# EAGLE board board (EAGLE 9.2.0)
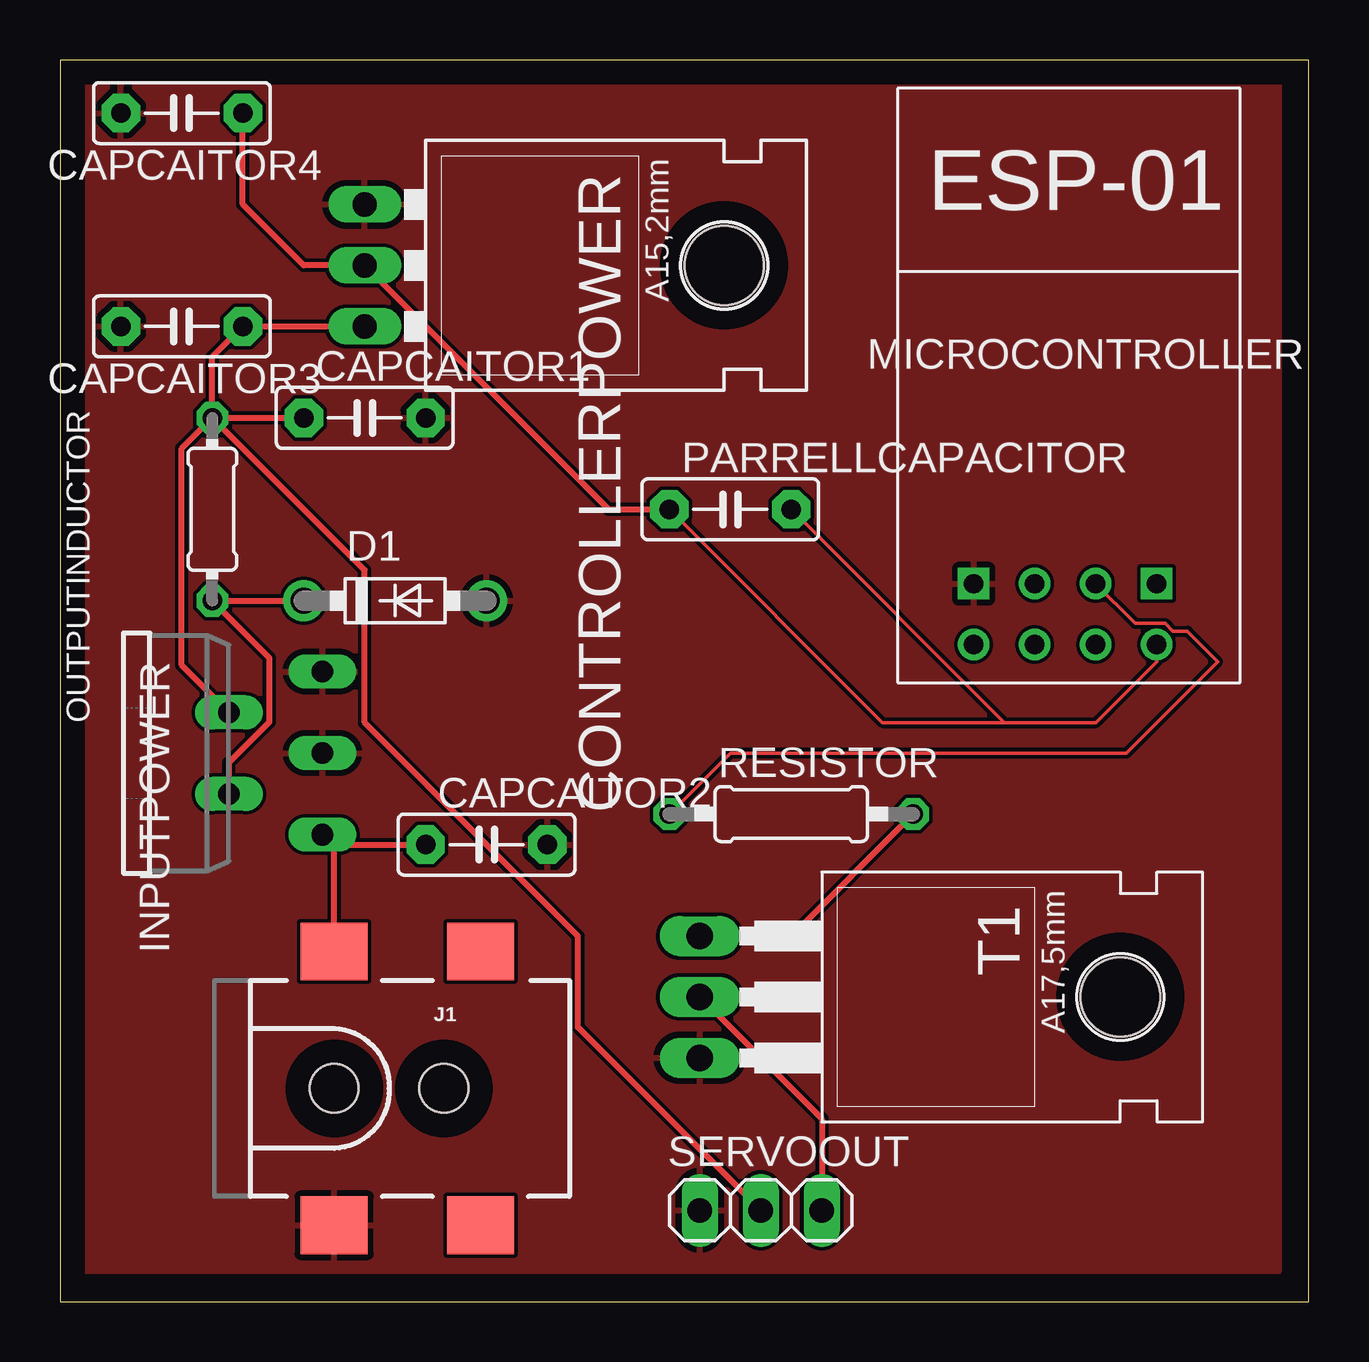
[diagram p0: board, top side]

Size 52.05 x 51.74 mm. Coordinates in mm from the lower left corner, seen from the top.
Outline: 0,0 52.05,0 52.05,51.74 0,51.74 0,0
Copper layers (1*16): Top 0.035mm / dielectric 1.5mm / Bottom 0.035mm
Design rules "default": minimum track width 6mil, minimum drill 0.35mm, track to track 6mil, track to pad 6mil, pad to pad 6mil, via to via 6mil, smd to smd 6mil, copper to edge 40mil, drill to drill 6mil, minimum pad ring 10mil, minimum via ring 8mil, stop-mask expansion 4mil, vias tented up to drill 0mil, thermal gap 10mil

## Footprints (pad centres in the part's own frame; a part is rotated, then mirrored left to right if it is on the bottom)
C5B2.5 = drill 0.813 pad 1.6 octagon: 1 -2.54,0; 2 2.54,0
LD1117V33 = drill 1.016 long: GND -2.54,-8.89; IN 2.54,-8.89; OUT 0,-8.89 | hole 3.302: 0,6.096
DO41-7.6 = drill 1.1 pad 1.7: A 3.81,0; C -3.81,0
TO220-5 = drill 0.9 long: 1 -3.4,-8.4; 2 -1.7,-4.5; 3 0,-8.4; 4 1.7,-4.5; 5 3.4,-8.4
POWER_JACK_SMD = smd 2.8 x 2.4: GND 0,-5.7; P$4 6.1,-5.7; VIN0 0,5.7; VIN1 6.1,5.7 | hole 2.032: 0,0; 4.572,0
ESP01 = drill 0.8: CH_PD -1.285,-8.178; GPIO0 1.255,-5.638; GPIO2 -1.285,-5.638; RST 1.255,-8.178; TX -3.825,-8.178; VCC 3.795,-8.178 | drill 0.8 square: GND -3.825,-5.638; RX 3.795,-5.638
0204/7 = drill 0.813 octagon: 1 -3.81,0; 2 3.81,0
0207/10 = drill 0.813 octagon: 1 -5.08,0; 2 5.08,0
1X03 = drill 1.016 long: 1 -2.54,0; 2 0,0; 3 2.54,0
TO220 = drill 1.118 long: 1 -2.54,-6.35; 2 0,-6.35; 3 2.54,-6.35 | hole 3.302: 0,11.176

## Placement (x,y rotation side)
CAPCAITOR1  1000uf  [C5B2.5]  12.7,36.83 0 top
CAPCAITOR2  100uf  [C5B2.5]  17.78,19.05 0 top
CAPCAITOR3  100nf  [C5B2.5]  5.08,40.64 180 top
CAPCAITOR4  10uf  [C5B2.5]  5.08,49.53 180 top
CONTROLLERPOWER  LD1117V33  [LD1117V33]  21.59,43.18 270 top
D1  1N5817-T  [DO41-7.6]  13.97,29.21 0 top
INPUTPOWER  LM2575-5.0T  [TO220-5]  2.54,22.86 90 top
J1  5.5x2.1mm Barrel  [POWER_JACK_SMD]  11.43,8.89 0 top
MICROCONTROLLER  ESP01  [ESP01]  41.91,35.56 0 top
OUTPUTINDUCTOR  330uH  [0204/7]  6.35,33.02 90 top
PARRELLCAPACITOR  01uf  [C5B2.5]  27.94,33.02 0 top
RESISTOR  1000  [0207/10]  30.48,20.32 0 top
SERVOOUT  [1X03]  29.21,3.81 0 top
T1  TIP122  [TO220]  33.02,12.7 270 top

## Library data of the parts
CAPCAITOR1-CAPCAITOR4 PARRELLCAPACITOR = capacitor-wima
CONTROLLERPOWER = LD1117V33
D1 = _mod_diode
INPUTPOWER = lm2575
J1 = SparkFun-Connectors; PROD_ID: CONN-08106; SF_ID: PRT-12748
MICROCONTROLLER = esp8266modules
OUTPUTINDUCTOR = eagle-ltspice; SPICEMODEL: NONE; SPICEPREFIX: L
RESISTOR = eagle-ltspice; SPICEMODEL: NONE; SPICEPREFIX: R
SERVOOUT = pinhead
T1 = transistor

## Nets
GND: CAPCAITOR1.2 CAPCAITOR2.2 CAPCAITOR3.2 CAPCAITOR4.2 CONTROLLERPOWER.GND D1.A INPUTPOWER.3 INPUTPOWER.5 J1.GND MICROCONTROLLER.GND SERVOOUT.1 T1.3
N$1: CAPCAITOR2.1 INPUTPOWER.1 J1.VIN0
N$3: D1.C INPUTPOWER.2 OUTPUTINDUCTOR.1
N$5: CAPCAITOR1.1 CAPCAITOR3.1 CONTROLLERPOWER.IN INPUTPOWER.4 OUTPUTINDUCTOR.2 SERVOOUT.2
N$7: CAPCAITOR4.1 CONTROLLERPOWER.OUT MICROCONTROLLER.VCC PARRELLCAPACITOR.1 PARRELLCAPACITOR.2
N$8: RESISTOR.2 T1.1
N$9: MICROCONTROLLER.GPIO0 RESISTOR.1
N$10: SERVOOUT.3 T1.2

## Tracks (layer width: path | path; a pad name or v marks a point on that pad's centre or on a via)
GND
  pour Top: 0,50.8 50.8,50.8 50.8,1.27 0,1.27
N$1
  Top 0.254: J1.VIN0 11.43,19.05 11.02,19.46 INPUTPOWER.1 11.35,19.05 CAPCAITOR2.1
N$3
  Top 0.254: D1.C OUTPUTINDUCTOR.1 8.73,26.83 8.73,24.15 7.04,22.46 INPUTPOWER.2
N$5
  Top 0.254: OUTPUTINDUCTOR.2 CAPCAITOR1.1 | INPUTPOWER.4 5.08,26.52 5.08,35.56 OUTPUTINDUCTOR.2 | OUTPUTINDUCTOR.2 6.35,39.37 CAPCAITOR3.1 CONTROLLERPOWER.IN | SERVOOUT.2 21.59,11.43 21.59,15.24 12.7,24.13 12.7,30.48 OUTPUTINDUCTOR.2
N$7
  Top 0.152: PARRELLCAPACITOR.2 39.37,24.13 | 39.37,24.13 43.18,24.13 45.72,26.67 45.72,27.37 MICROCONTROLLER.VCC | PARRELLCAPACITOR.1 34.29,24.13 39.37,24.13
  Top 0.254: CAPCAITOR4.1 7.62,45.72 10.16,43.18 CONTROLLERPOWER.OUT 22.86,33.02 PARRELLCAPACITOR.1
N$8
  Top 0.254: RESISTOR.2 30.48,15.24 T1.1
N$9
  Top 0.152: MICROCONTROLLER.GPIO0 44.82,28.27 46.07,28.27 46.4,27.94 46.99,27.94 48.26,26.67 44.45,22.86 27.94,22.86 RESISTOR.1
N$10
  Top 0.254: T1.2 31.75,7.62 SERVOOUT.3